# Altium PCB curgen.PcbDoc
Units mm, origin at the board's own origin, x right, y up, seen from the top; angles counter-clockwise.
Board outline 100 x 80 mm, 2 copper layers (Top Layer, Bottom Layer); 53 components, 38 nets, 199 pads, 50 vias.
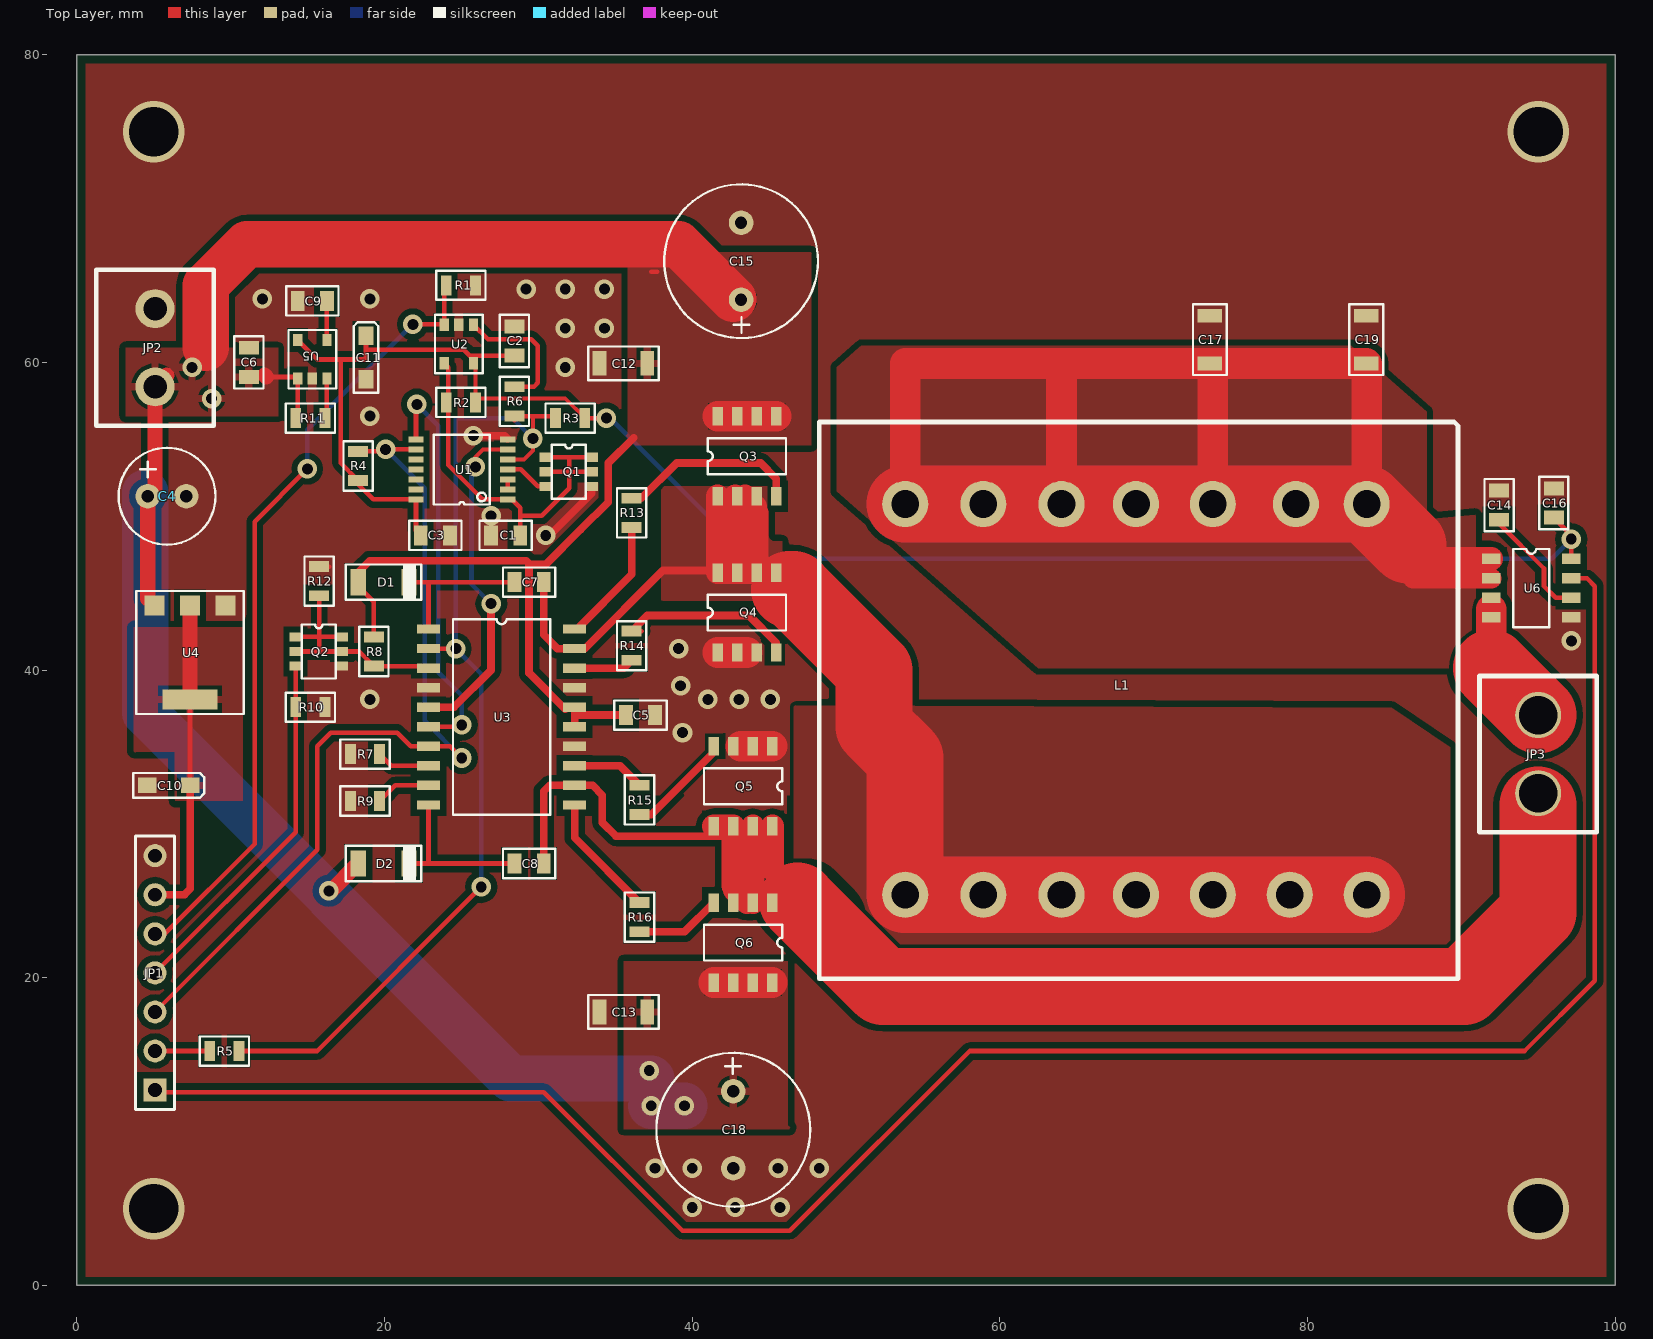
[diagram p0: Top Layer view]
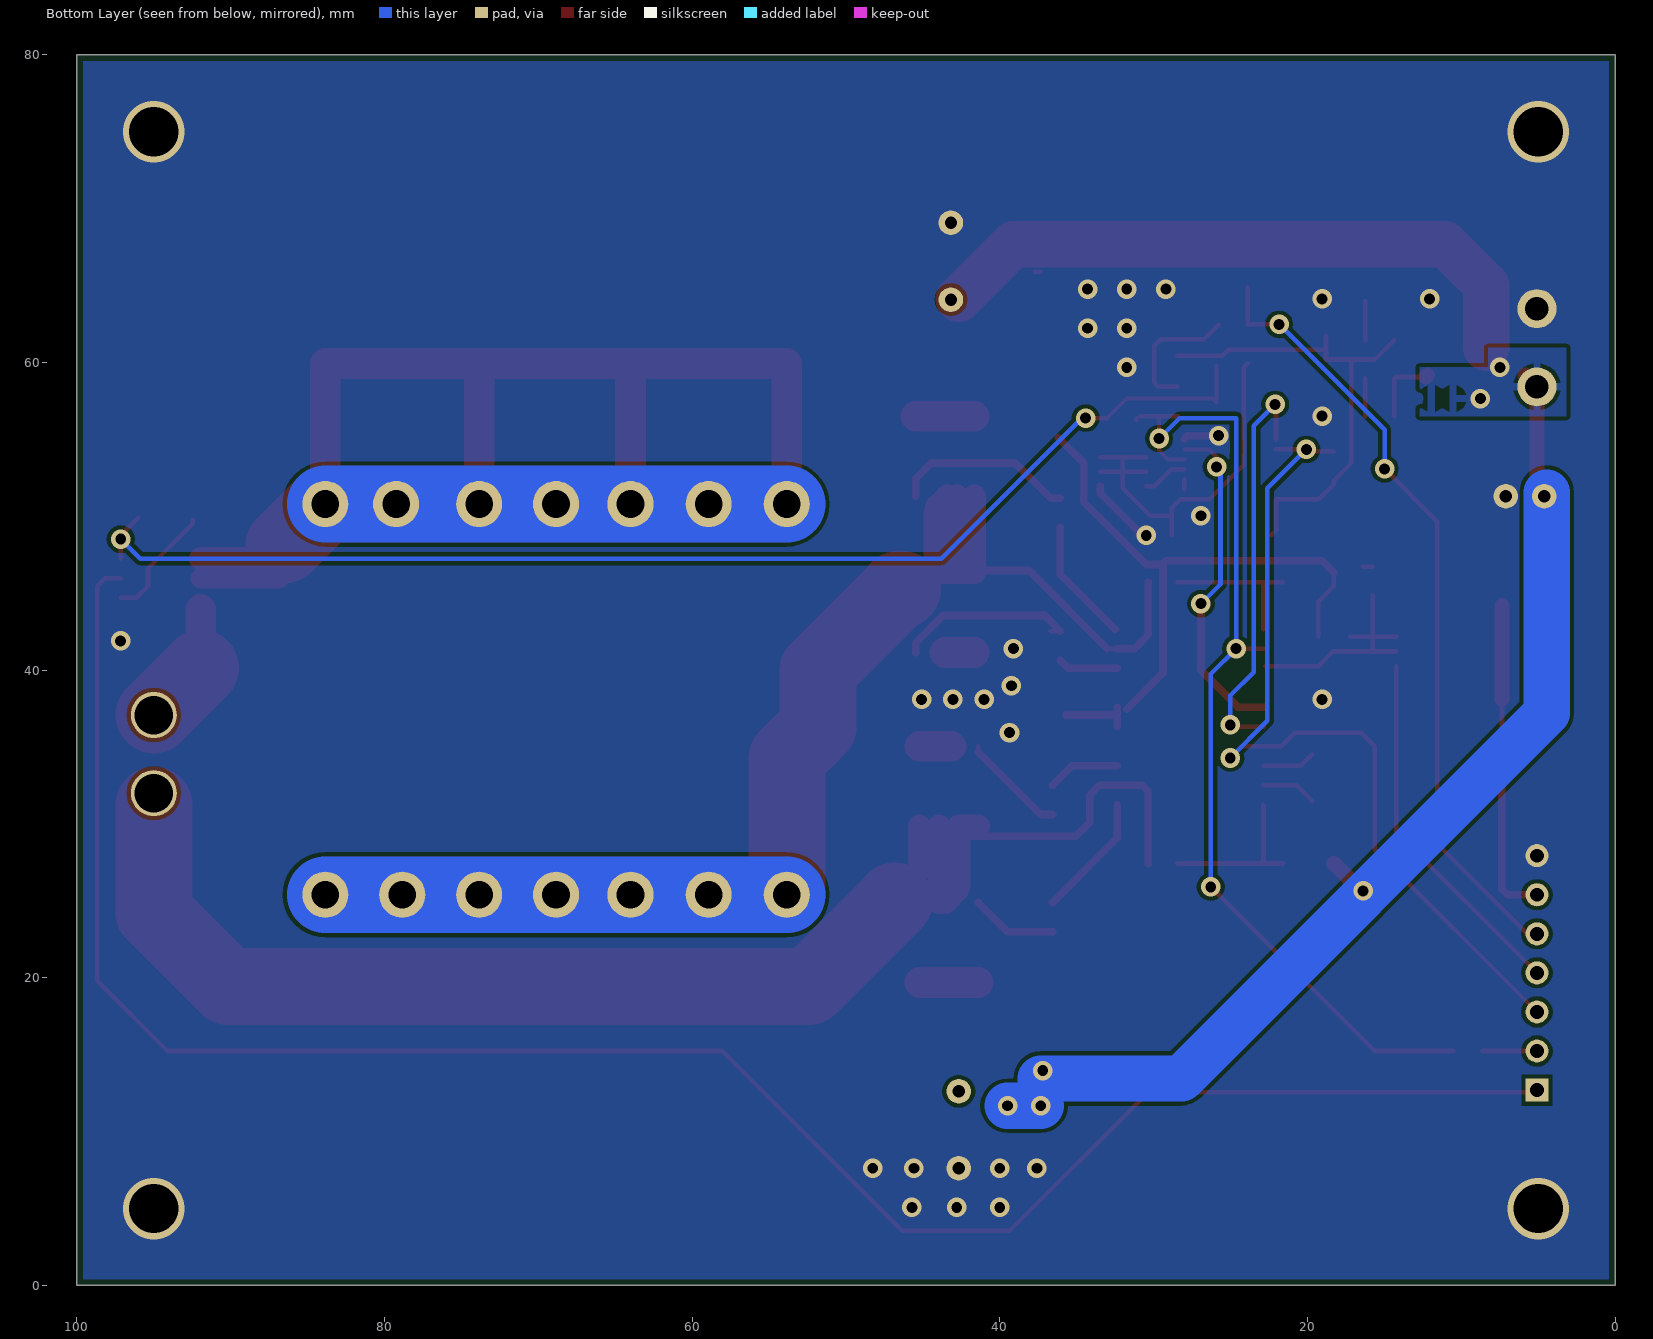
[diagram p1: Bottom Layer view, seen from below]

## Layer stack, top to bottom
Top Layer: signal copper 0.0356
Dielectric: dielectric 0.32, FR-4, Dk 4.8
Bottom Layer: signal copper 0.0356

## Board outline
0,0 100,0 100,80 0,80

## Design rules (kind name [scope] priority, off if disabled: settings)
Clearance Clearance_3 [InNamedPolygon('GND_B')] p1: gap=0.254
Clearance Clearance_2 [InNamedPolygon('GND_B')] p2: gap=0.4
Clearance Clearance_1 [InNamedPolygon('GND_T')] p3: gap=0.4
Clearance [All] p4: gap=0.25
HoleSize [All] p1: absolutevalues=TRUE maxlimit=10 minlimit=0.025 maxpercent=80.000 minpercent=20.000
MinimumSolderMaskSliver [All] p1: minsoldermaskwidth=0
PolygonConnect PolygonConnect_12 [All vs IsNamedPolygon('VCPU')] p1: connectstyle=Direct reliefconductorwidth=0.254 reliefentries=4 polygonreliefangle="90 Angle"
PolygonConnect PolygonConnect_11 [All vs IsNamedPolygon('GND_B')] p2: connectstyle=Direct reliefconductorwidth=0.254 reliefentries=4 polygonreliefangle="90 Angle"
PolygonConnect PolygonConnect_10 [All vs IsNamedPolygon('GND_T')] p3: connectstyle=Direct reliefconductorwidth=0.254 reliefentries=4 polygonreliefangle="90 Angle"
PolygonConnect PolygonConnect_9 [All vs IsNamedPolygon('GND_T2')] p4: connectstyle=Direct reliefconductorwidth=0.254 reliefentries=4 polygonreliefangle="90 Angle"
PolygonConnect PolygonConnect_8 [All vs IsNamedPolygon('VCPU')] p5: connectstyle=Direct reliefconductorwidth=0.254 reliefentries=4 polygonreliefangle="90 Angle"
PolygonConnect PolygonConnect_7 [All vs IsNamedPolygon('+12_1')] p6: connectstyle=Direct reliefconductorwidth=0.254 reliefentries=4 polygonreliefangle="90 Angle"
PolygonConnect PolygonConnect_6 [All vs IsNamedPolygon('+12_2')] p7: connectstyle=Direct reliefconductorwidth=0.254 reliefentries=4 polygonreliefangle="90 Angle"
PolygonConnect PolygonConnect_5 [All vs IsNamedPolygon('+12_B')] p8: connectstyle=Direct reliefconductorwidth=0.254 reliefentries=4 polygonreliefangle="90 Angle"
PolygonConnect PolygonConnect_4 [All vs IsNamedPolygon('+12_T')] p9: connectstyle=Direct reliefconductorwidth=0.254 reliefentries=4 polygonreliefangle="90 Angle"
PolygonConnect PolygonConnect_3 [All vs IsNamedPolygon('C7_2')] p10: connectstyle=Direct reliefconductorwidth=0.254 reliefentries=4 polygonreliefangle="90 Angle"
PolygonConnect PolygonConnect_2 [All vs IsNamedPolygon('C7_2_1')] p11: connectstyle=Direct reliefconductorwidth=0.254 reliefentries=4 polygonreliefangle="90 Angle"
PolygonConnect PolygonConnect_1 [All vs IsNamedPolygon('C17_1')] p12: connectstyle=Direct reliefconductorwidth=0.254 reliefentries=4 polygonreliefangle="90 Angle"
PolygonConnect [All] p13: connectstyle=Relief reliefconductorwidth=0.5 reliefentries=4 polygonreliefangle="90 Angle"
RoutingVias [All] p1: holewidth=0.5 width=1 viastyle="Through Hole" minholewidth=0.5 minwidth=1 maxholewidth=4 maxwidth=5
SilkToSilkClearance [All] p1: silktosilkclearance=0
SilkscreenOverComponentPads [All] p1: minsilkscreentomaskgap=0
SolderMaskExpansion [All] p1: expansion=0.102
Width [All] p1: maxlimit=10 minlimit=0.2 preferedwidth=0.5
24 further rules are at their usual default settings.

## Components (designator, comment, footprint, x,y, rotation, side; value= is the part's Value field where it differs from the comment)
C1 "470p" C-0805 26.924,48.768 r0 top
C2 "100n" C-0805 28.448,60.452 r90 top
C3 "100n" C-0805 22.352,48.768 r0 top
C4 "100u*25V" EXR-6.3X11 7.112,51.308 r180 top
C5 "100n" C-0805 37.592,37.084 r180 top
C6 "100n" C-0805 11.176,60.96 r270 top
C7 "330n" C-0805 28.448,45.72 r0 top
C8 "330n" C-0805 28.448,27.432 r0 top
C9 "100n" C-0805 16.256,64.008 r180 top
C10 "22u" TANTAL-A 4.572,32.512 r0 top
C11 "22u" TANTAL-A 18.796,58.928 r90 top
C12 "3u3" C-1206 37.084,59.944 r180 top
C13 "3u3" C-1206 37.084,17.78 r180 top
C14 "1n" C-0805 92.456,49.784 r90 top
C15 "4700u*25V" EXR-10X12.5 43.18,69.088 r270 top
C16 "100n" C-0805 96.012,51.816 r270 top
C17 "3u3" C-1206 73.66,59.944 r90 top
C18 "4700u*25V" EXR-10X12.5 42.672,7.62 r90 top
C19 "3u3" C-1206 83.82,59.944 r90 top
D1 "LL4148" SOD-80 18.288,45.72 r0 top
D2 "LL4148" SOD-80 18.288,27.432 r0 top
JP1 "Header 7" HDR1X7 5.08,12.7 r90 top
JP2 "Header 2" KLEMMA2#1 5.08,55.88 r90 top
JP3 "Header 2" KLEMMA2#2 94.996,39.624 r270 top
L1 "L*" ETD34 53.848,25.4 r0 top
Q1 "IRF5802" SOT-23L-6 30.48,53.848 r0 top
Q2 "IRF5802" SOT-23L-6 14.224,42.164 r0 top
Q3 "IRF7842" SO8-(SOT-96-1) 41.656,51.308 r90 top
Q4 "IRF7842" SO8-(SOT-96-1) 41.656,41.148 r90 top
Q5 "IRF7842" SO8-(SOT-96-1) 45.212,35.052 r270 top
Q6 "IRF7842" SO8-(SOT-96-1) 45.212,24.892 r270 top
R1 "20k" R-0805 25.908,65.024 r180 top
R2 "22k*" R-0805 25.908,57.404 r180 top
R3 "15k" R-0805 33.02,56.388 r180 top
R4 "15k" R-0805 18.288,52.324 r90 top
R5 "0" R-0805 8.636,15.24 r0 top
R6 "0" R-0805 28.448,58.42 r270 top
R7 "100k" R-0805 17.78,34.544 r0 top
R8 "15k" R-0805 19.304,42.164 r270 top
R9 "100k" R-0805 17.78,31.496 r0 top
R10 "47k" R-0805 14.224,37.592 r0 top
R11 "0" R-0805 14.224,56.388 r0 top
R12 "3k3" R-0805 15.748,46.736 r270 top
R13 "0" R-0805 36.068,49.276 r90 top
R14 "0" R-0805 36.068,40.64 r90 top
R15 "0" R-0805 36.576,32.512 r270 top
R16 "0" R-0805 36.576,24.892 r270 top
U1 "74AHC14" SSOP14 28.448,50.8 r180 top
U2 "TS951ILT" SOT-23-5 23.876,60.452 r0 top
U3 "HIP4081AIB" SO20-(SOT-163-1) 22.86,42.672 r0 top
U4 "LD1117-33" SOT-223-(SC-73) 9.652,44.196 r180 top
U5 "LP2982-5.0" SOT-23-5 16.256,60.96 r180 top
U6 "ACS712" SO8-(SOT-96-1) 91.948,47.244 r0 top

## Footprints (in the part's own frame and the unit in brackets; to place one, negate y for a bottom-side part, rotate by r counter-clockwise, add the part's x,y. Pads: shape width x height; smd on the part's side, far side on the other; paste and mask are expansions set on the pad)
C-0805 [mm]
  rect 0.9x1.3 smd: 1(0,0) 2(1.9,0)
  silkscreen extent -0.75,-0.95 2.65,0.95
C-1206 [mm]
  rect 0.9x1.6 smd: 1(0,0) 2(3.1,0)
  silkscreen extent -0.75,-1.1 3.85,1.1
ETD34 [mm]
  round 3 hole 1.8: 1(0,0) 1(5.08,0) 1(10.16,0) 1(15,0) 1(20,0) 1(25,0) 1(30,0) 2(0,25.4) 2(5.08,25.4) 2(10.16,25.4) 2(15,25.4) 2(20,25.4) 2(25.4,25.4) 2(30,25.4)
  silkscreen extent -5.59,-5.46 35.94,30.73
EXR-6.3X11 [mm]
  round 1.6 hole 0.8: 1(0,0) 2(2.5,0)
  silkscreen extent -1.9,-3.15 4.4,3.15
EXR-10X12.5 [mm]
  round 1.6 hole 0.8: 1(0,0) 2(5,0)
  silkscreen extent -2.5,-5 7.5,5
HDR1X7 [mm] "Connector; Header; 7 Position"
  rect 1.5x1.5 hole 0.9: 1(0,0)
  round 1.5 hole 0.9: 2(2.54,0) 3(5.08,0) 4(7.62,0) 5(10.16,0) 6(12.7,0) 7(15.24,0)
  silkscreen extent -1.27,-1.27 16.51,1.27
KLEMMA2#1 [mil]
  round 100 hole 60: 1(100,0) 2(300,0)
  silkscreen extent 0,-150 400,150
KLEMMA2#2 [mil]
  round 118.11 hole 98.43: 1(100,0) 2(300,0)
  silkscreen extent 0,-150 400,150
R-0805 [mm]
  rect 0.7x1.3 smd: 1(0,0) 2(1.9,0)
  silkscreen extent -0.65,-0.95 2.55,0.95
SO8-(SOT-96-1) [mm]
  rect 1.2x0.7 smd: 1(0,0) 2(0,-1.27) 3(0,-2.54) 4(0,-3.81) 5(5.2,-3.81) 6(5.2,-2.54) 7(5.2,-1.27) 8(5.2,0)
  silkscreen extent 1.44,-4.44 3.77,0.63
SO20-(SOT-163-1) [mm]
  rect 1.5x0.6 smd: 1(0,0) 2(0,-1.27) 3(0,-2.54) 4(0,-3.81) 5(0,-5.08) 6(0,-6.35) 7(0,-7.62) 8(0,-8.89) 9(0,-10.16) 10(0,-11.43) 11(9.5,-11.43) 12(9.5,-10.16) 13(9.5,-8.89) 14(9.5,-7.62) 15(9.5,-6.35) 16(9.5,-5.08) 17(9.5,-3.81) 18(9.5,-2.54) 19(9.5,-1.27) 20(9.5,0)
  silkscreen extent 1.58,-12.06 7.92,0.64
SOD-80 [mm]
  rect 1x1.7 smd: A(0,0) K(3.3,0)
  silkscreen extent -0.8,-1.15 4.1,1.15
SOT-23-5 [mm]
  rect 0.6x0.8 smd: 1(1.9,2) 2(0.95,2) 3(0,2) 4(0,-0.5) 5(1.9,-0.5)
  silkscreen extent -0.6,-1.15 2.5,2.65
SOT-23L-6 [mm]
  rect 0.8x0.6 smd: 1(0,0) 2(0,-0.95) 3(0,-1.9) 4(3,-1.9) 5(3,-0.95) 6(3,0)
  silkscreen extent 0.4,-2.7 2.6,0.8
SOT-223-(SC-73) [mm]
  rect 1.3x1.3 smd: 1(0,0) 2(2.3,0) 3(4.6,0)
  rect 3.6x1.3 smd: 4(2.3,6.1)
  silkscreen extent -1.2,-0.95 5.8,7.05
SSOP14 [mm]
  rect 1x0.4 smd: 1(0.45,-0.3) 2(0.45,-0.95) 3(0.45,-1.6) 4(0.45,-2.25) 5(0.45,-2.9) 6(0.45,-3.55) 7(0.45,-4.2) 8(6.4,-4.2) 9(6.4,-3.55) 10(6.4,-2.9) 11(6.4,-2.25) 12(6.4,-1.6) 13(6.4,-0.95) 14(6.4,-0.3)
  silkscreen extent 1.61,-4.5 5.24,0.03
TANTAL-A [mm]
  rect 1.2x1 smd: 1(0,0) 2(2.8,0)
  silkscreen extent -0.9,-0.8 3.7,0.8

## Part data
C1 C2 C3 C5 C6 C7 C8 C9 C12 C13 C14 C16 C17 C19: library part C
C4 C15 C18: library part C-EL-DIP
C10 C11: library part C-EL-TAN
D1 D2: library part DIODE
JP1: "Header, 7-Pin"
JP2 JP3: "Header, 2-Pin"
Q1 Q2: library part "MOSFET N SOT23-6"
R1 R2 R3 R4 R5 R6 R7 R8 R9 R10 R11 R12 R13 R14 R15 R16: library part R
U1: "Hex Inverter With Schmitt Trigger"
U2: "RAIL TO RAIL single BiCMOS"
U4: library part LD1117
U5: library part LP2982, "50mA Ultra Low-Dropout Regulator"

## Via types
v1: diameter 1.27, hole 0.711, Top Layer to Bottom Layer, 46 vias
v2: diameter 4, hole 3.2, Top Layer to Bottom Layer, 4 vias

## Nets (pads, with @x,y where several pads share a name; then routed paths per layer and width w, separated by ;. In a path a pad name is that pad's centre, name@x,y a point inside that pad or via, vN(x,y) a via of type N, cw(c..) or ccw(c..) an arc to the next point about the centre after c; other vN are vias at no path point)
1: C1.2 Q1.1 Q1.2 Q1.5 Q1.6 R2.2 U1.1 U2.4 | length 26.3
  Top Layer w0.3: U2.4 24.13,59.698 24.13,53.34 26.37,51.1 U1.1 28.275,51.1 28.824,50.551 C1.2 ; 28.824,50.038 30.226,50.038 32.004,51.816 32.004,52.898 ; Q1.2 32.004,52.898 ; Q1.1 32.004,53.848 ; Q1.5 32.004,52.898 ; Q1.6 32.004,53.848 ; 32.004,52.898 32.004,53.848
+12V: C4.2 C5.2 C6.2 C12.1 C13.1 C15.2 C18.2 D1.A D2.A JP2.1 Q3.5 Q3.6 Q3.7 Q3.8 Q6.5 Q6.6 Q6.7 Q6.8 R8.1 R11.1 U3.15 U3.16 U4.3 U5.1 | length 173.4
  Top Layer w0.3: JP2.1 JP2.1@5.72,59.06 ; 12.319,59.06 U5.1@14.256,59.06 ; R11.1@14.356,56.52 U5.1 ; D1.A@18.288,46.355 D1.A 18.288,45.466 19.304,44.45 R8.1 ; 37.338,65.913 37.719,65.913
  Top Layer w0.5: D1.A@18.288,46.355 19.05,47.117 29.21,47.117 29.398,46.929 29.398,39.817 U3.16@31.75,37.465 ; 29.457,46.87 30.487,46.87 32.766,49.149 34.544,50.927 34.544,53.467 36.195,55.118 ; U3.15 32.36,37.084 ; U3.16 32.36,37.084 ; C5.2 32.36,37.084
  Top Layer w1: U4.3@4.612,44.636 C4.2 ; C4.2@5.08,51.776 JP2.1 JP2.1@5.842,59.182 ; 12.197,59.182 12.319,59.06 ; v1@16.447,25.59 D2.A
  Top Layer w2: Q6.5 Q6.8 ; Q3.8 Q3.5
  Top Layer w3: 8.382,60.96 8.382,65.024 11.049,67.691 39.116,67.691 C15.2@42.672,64.135
  Bottom Layer w3: C4.2@4.445,51.562 4.445,37.211 28.194,13.462 v1@37.338,13.462 ; v1(37.338,11.684) v1(39.497,11.684)
  other v1: 37.211,13.97 16.383,25.654 8.763,57.658 7.493,59.69
DIS: Q2.1 Q2.2 Q2.5 Q2.6 R8.2 R12.2 U3.3 | length 15.4
  Top Layer w0.3: Q2.2 Q2.5 18.354,41.214 R8.2 U3.3@22.728,40.264 ; Q2.1 15.748,42.164 ; 15.748,41.341 15.748,42.164 ; R12.2 15.748,42.164 ; Q2.6 15.748,42.164
EN: JP1.4 Q2.3 R10.1 | length 23.7
  Top Layer w0.3: JP1.4 14.224,29.464 R10.1 Q2.3
GND: C1.1 C2.2 C3.2 C4.1 C5.1 C6.1 C9.2 C10.1 C11.1 C12.2 C13.2 C14.2 C15.1 C16.1 C17.2 C18.1 C19.2 JP1.7 JP2.2 Q1.4 Q2.4 Q4.1 Q4.2 Q4.3 Q5.1 Q5.2 Q5.3 R1.1 R7.1 R9.1 R10.2 R12.1 U1.7 U2.2 U3.4 U3.14 U3.17 U4.1 U5.2 U6.5 | length 11.5
  Top Layer w0.3: R12.1 R12.1@16.395,46.736
  Top Layer w0.5: v1(25.781,55.245) 27.803,55.245 U1.7@27.998,55.05 ; v1(30.48,48.768) 30.734,48.768 33.48,51.514 Q1.4
  Top Layer w2: Q4.1 43.561,41.148 ; 43.18,35.052 Q5.1
  other v1: 40.005,5.08 42.799,5.08 45.72,5.08 37.592,7.62 40.005,7.62 45.593,7.62 48.26,7.62 39.37,35.941 19.05,38.1 41.021,38.1 43.053,38.1 45.085,38.1 39.243,38.989 39.116,41.402 97.155,41.91 26.924,50.038 19.05,56.515 31.75,59.69 31.75,62.23 34.29,62.23 12.065,64.135 19.05,64.135 29.21,64.77 31.75,64.77 34.29,64.77
  other v2: 5,5 95,5 5,75 95,75
GND-D: 
NetC7_1: C7.1 D1.K U3.1 | length 9.9
  Top Layer w0.3: D1.K 22.86,45.72 ; U3.1 22.86,45.72 ; C7.1 22.86,45.72
NetC7_2: C7.2 L1.1 Q3.1 Q3.2 Q3.3 Q4.5 Q4.6 Q4.7 Q4.8 U3.19 | length 122.8
  Top Layer w0.3: U3.19 U3.19@33.02,41.402 ; Q3.1 Q3.2@42.799,51.308
  Top Layer w0.5: C7.2 30.348,42.296 31.242,41.402 U3.19 ; U3.19@33.02,41.402 38.1,46.482 Q4.8@41.522,46.482
  Top Layer w1.5: Q3.1 Q4.8 ; Q3.2@42.799,51.308 42.799,46.348 Q4.8 ; 43.434,51.308 44.116,50.626 44.116,50.294 44.196,50.214 Q4.6 ; 46.334,45.233 45.219,46.348 Q4.6 ; Q4.8 Q4.6
  Top Layer w5: 46.334,45.233 46.581,45.233 48.761,43.053 51.816,39.998 51.816,36.322 53.848,34.29 53.848,25.4 58.928,25.4 64.008,25.4 68.848,25.4 73.848,25.4 78.848,25.4 L1.1@83.848,25.4
  Bottom Layer w5: L1.1@53.848,25.4 58.928,25.4 64.008,25.4 68.848,25.4 73.848,25.4 78.848,25.4 L1.1@83.848,25.4
NetC8_1: C8.1 D2.K U3.10 | length 10.7
  Top Layer w0.3: D2.K C8.1 ; 22.86,27.432 U3.10
NetC8_2: C8.2 JP3.2 Q5.5 Q5.6 Q5.7 Q5.8 Q6.1 Q6.2 Q6.3 U3.12 | length 97.5
  Top Layer w0.3: Q5.6 Q5.7 Q5.8 ; 43.561,24.892 Q6.2 Q6.1
  Top Layer w0.5: C8.2 30.348,32.126 30.734,32.512 U3.12 33.528,32.512 34.163,31.877 34.163,30.099 35.052,29.21 42.545,29.21
  Top Layer w1.5: Q5.5 Q5.6 42.672,25.986 42.752,25.906 42.752,25.701 43.561,24.892 ; Q6.2 Q5.7 ; 45.212,27.051 Q5.8
  Top Layer w5: 46.834,24.99 52.392,19.431 90.17,19.431 94.996,24.257 JP3.2@94.996,31.242
NetC9_1: C9.1 U5.4 | length 2.5
  Top Layer w0.3: U5.4 C9.1
NetC14_1: C14.1 U6.6 | length 7.6
  Top Layer w0.3: C14.1 92.456,49.53 95.375,46.611 95.375,45.468 96.139,44.704 96.935,44.704 U6.6
NetC17_1: C17.1 C19.1 L1.2 U6.1 U6.2 | length 139.5
  Top Layer w0.3: L1.2@83.312,50.8 L1.2@83.848,50.8
  Top Layer w1.3: 86.868,45.974 U6.2
  Top Layer w1.5: 87.404,47.244 U6.1
  Top Layer w2: L1.2@53.848,50.8 53.848,59.944 C17.1 C19.1 ; L1.2@64.008,50.8 64.008,59.69 ; L1.2@73.848,50.8 C17.1@73.848,59.756 ; L1.2@83.848,50.8 C19.1@83.848,59.916
  Top Layer w5: L1.2@53.848,50.8 58.928,50.8 64.008,50.8 68.848,50.8 73.848,50.8 79.248,50.8 L1.2@83.312,50.8 ; L1.2@83.848,50.8 86.527,48.121
  Bottom Layer w5: L1.2@53.848,50.8 58.928,50.8 64.008,50.8 68.848,50.8 73.848,50.8 79.248,50.8 L1.2@83.848,50.8
NetJP1_2: JP1.2 R5.1 | length 3.6
  Top Layer w0.3: JP1.2 R5.1
NetJP3_1: JP3.1 U6.3 U6.4 | length 8.1
  Top Layer w2: 91.948,40.132 91.948,43.942
  Top Layer w5: 91.948,40.132 JP3.1
NetL1_1: 
NetQ1_3: Q1.3 U1.4 | length 2.9
  Top Layer w0.3: U1.4 28.865,53.05 29.967,51.948 Q1.3
NetQ3_4: Q3.4 R13.2 | length 11.9
  Top Layer w0.5: R13.2 36.698,51.176 38.989,53.467 44.45,53.467 45.466,52.451 Q3.4
NetQ4_4: Q4.4 R14.2 | length 11.8
  Top Layer w0.3: R14.2 R14.2@36.708,42.54
  Top Layer w0.5: R14.2 37.084,43.556 43.693,43.556 45.466,41.783 Q4.4
NetQ5_4: Q5.4 R15.2 | length 6.9
  Top Layer w0.3: Q5.4@41.402,34.671 Q5.4
  Top Layer w0.5: R15.2 37.343,30.612 Q5.4@41.402,34.671
NetQ6_4: Q6.4 R16.2 | length 5.6
  Top Layer w0.5: R16.2 39.502,22.992 Q6.4
NetR6_1: R6.1 U2.1 | length 8.8
  Top Layer w0.3: U2.1 26.726,61.502 29.264,61.502 29.287,61.525 29.534,61.525 29.972,61.087 29.972,58.674 29.718,58.42 R6.1
NetR7_2: R7.2 U3.8 | length 3.5
  Top Layer w0.3: R7.2 20.442,33.782 U3.8
NetR9_2: R9.2 U3.9 | length 3.6
  Top Layer w0.3: R9.2 20.696,32.512 U3.9
NetR11_2: R11.2 U5.3 | length 2.4
  Top Layer w0.3: R11.2@16.256,56.52 U5.3
NetR13_1: R13.1 U3.20 | length 8.2
  Top Layer w0.3: U3.20 U3.20@32.512,42.672
  Top Layer w0.5: U3.20@32.512,42.672 36.068,46.228 R13.1
NetR14_1: R14.1 U3.18 | length 3.9
  Top Layer w0.5: U3.18 35.56,40.132 R14.1
NetR15_1: R15.1 U3.13 | length 4.7
  Top Layer w0.5: U3.13 35.306,33.782 R15.1
NetR16_1: R16.1 U3.11 | length 8.1
  Top Layer w0.5: U3.11 32.36,29.108 R16.1
NetU1_2: U1.2 U1.3 | length 0.7
  Top Layer w0.3: U1.2 U1.3
NetU1_6: U1.6 U3.5 | length 21.5
  Top Layer w0.254: v1(25.908,53.213) 25.908,53.848 26.41,54.35 U1.6
  Top Layer w0.5: U3.5 24.511,37.592 26.924,40.005 v1(26.924,44.323)
  Bottom Layer w0.3: v1@25.654,52.959 25.654,45.593 v1(26.924,44.323)
NetU1_8: U1.8 U3.6 | length 26.2
  Top Layer w0.3: U1.8 v1@22.048,56.973 ; U3.6 24.892,36.322 v1(25.019,36.449)
  Bottom Layer w0.3: v1(22.098,57.277) 23.495,55.88 23.495,39.878 25.019,38.354 v1(25.019,36.449)
PWM: R3.2 R5.2 R6.2 U1.5 U3.2 | length 65.9
  Top Layer w0.254: U1.5 29.062,53.7 29.647,54.285 v1(29.647,55.062) 29.647,56.464
  Top Layer w0.3: R5.2 15.621,15.24 v1(26.289,25.908) ; U3.2 v1(24.638,41.402) ; R6.2@28.448,56.261 R6.2 R3.2@30.866,56.52 ; v1(29.647,55.062) v1@29.781,54.927 ; R3.2@31.12,56.266 R3.2
  Bottom Layer w0.3: v1@24.638,41.275 v1(24.638,41.402) ; v1(26.289,25.908) 26.289,39.751 v1(24.638,41.402) ; v1(29.647,55.062) 28.321,56.388 24.638,56.388 24.638,54.931 24.619,54.912 24.619,54.054 24.638,54.035 v1(24.638,41.402)
REVERSE: JP1.3 R4.2 U1.9 U3.7 | length 57.8
  Top Layer w0.3: JP1.3 15.621,28.321 15.621,35.052 16.51,35.941 20.828,35.941 21.717,35.052 U3.7 24.257,35.052 v1(25.019,34.29) ; R4.2 v1@19.946,54.224 ; v1(20.072,54.35) U1.9
  Bottom Layer w0.3: v1(20.072,54.35) 22.606,51.816 22.606,40.197 22.606,36.703 v1(25.019,34.29)
SENSE: JP1.1 U6.7 | length 131.8
  Top Layer w0.3: JP1.1@4.699,12.573 30.353,12.573 39.37,3.556 46.355,3.556 58.039,15.24 94.107,15.24 98.679,19.812 98.679,45.466 98.171,45.974 U6.7
V_CONT: JP1.5 R1.2 U2.3 | length 51.4
  Top Layer w0.3: JP1.5 5.715,22.86 11.557,28.702 11.557,49.657 v1(14.986,53.086) ; v1(21.844,62.484) U2.3@23.844,62.484 ; U2.3 R1.2@23.876,64.892
  Bottom Layer w0.3: v1(14.986,53.086) 14.986,55.626 v1(21.844,62.484)
V_CPU: C10.2 JP1.6 U4.2 U4.4 | length 20.8
  Top Layer w0.3: C10.2@7.352,32.532 U4.4
  Top Layer w0.5: JP1.6 6.991,25.4 7.372,25.781 C10.2
  Top Layer w1: U4.4 U4.2
VCC: C2.1 C3.1 C11.2 C16.2 R2.1 R3.1 R4.1 U1.14 U2.5 U5.5 U6.8 | length 113.2
  Top Layer w0.254: U2.5@25.908,59.82 R2.1 26.162,57.658 31.75,57.658 R3.1
  Top Layer w0.3: U5.5 15.618,60.198 17.145,60.198 ; C11.2 18.796,60.96 ; C3.1 22.048,49.072 U1.14 19.258,51.1 18.288,52.07 R4.1 17.145,53.467 17.145,60.198 ; C2.1 25.527,60.452 25.143,60.836 18.92,60.836 18.796,60.96 ; R3.1 v1(34.417,56.388) ; C16.2 97.148,48.78 v1(97.148,48.514) U6.8 ; 17.145,60.198 18.796,60.198 18.796,60.96
  Bottom Layer w0.3: v1@34.544,56.515 43.815,47.244 95.878,47.244 v1(97.148,48.514)
pads on no net: U1.10 U1.11 U1.12 U1.13

## Polygon pours and split planes (outlines as drawn)
GND on Top Layer "GND_T2" (solid, remove dead copper, pour order 1000): 37.356,42.9 37.338,42.883 37.338,31.877 48.133,31.877 48.387,31.623 48.26,31.75 48.26,42.926
GND on Top Layer "GND_T" (solid, remove dead copper, pour order 1010): 0,0 100,0 100,80 0,80
+12V on Top Layer "+12_T" (solid, remove dead copper, pour order 1009): 3.175,60.96 13.081,60.96 13.081,56.515 3.175,56.515
V_CPU on Top Layer "VCPU" (solid, remove dead copper, pour order 1008): 3.683,42.799 11.176,42.799 11.176,31.496 6.493,31.496 6.225,31.242 6.359,31.369 6.359,34.671 3.817,34.671 3.683,34.544
+12V on Top Layer "+12_2" (solid, remove dead copper, pour order 1007): 35.56,21.082 35.56,10.16 46.482,10.16 46.863,9.779 46.228,10.414 46.228,21.082
+12V on Top Layer "+12_1" (solid, remove dead copper, pour order 1006): 35.811,67.183 35.811,55.38 35.687,55.251 36.309,54.61 47.755,54.61 47.755,67.055 47.879,67.183
NetC7_2 on Top Layer "C7_2_1" (solid, remove dead copper, pour order 1005): 37.987,44.323 38.089,44.514 45.847,44.514 45.847,51.943 37.987,51.943
NetC7_2 on Top Layer "C7_2" (solid, remove dead copper, pour order 1004): 46.597,37.719 46.597,21.795 46.482,21.717 46.827,21.95 89.281,21.95 89.281,35 85.484,37.564
NetC17_1 on Top Layer "C17_1" (solid, remove dead copper, pour order 1003): 91.059,50.126 90.936,50.018 90.936,40.132 62.512,40.132 49.648,51.415 49.403,51.63 49.403,54.639 49.403,59.69 50.873,60.98 50.996,61.087 55.039,61.087 82.85,61.087 83.095,60.872 87.751,56.789 87.751,49.804
GND on Bottom Layer "GND_B" (solid, remove dead copper, pour order 1002): 0,0 100,0 99.822,0.178 99.822,80 0,80
+12V on Bottom Layer "+12_B" (solid, remove dead copper, pour order 1001): 3.175,60.96 3.175,56.515 12.7,56.515 12.7,59.69 8.255,59.69 8.255,60.96

## Silkscreen, mask and mechanical layers (free items; w line width, h text height)
Mechanical 1:
  lines w0.2: -10,-5 110,-5 110,85 -10,85 -10,-5